# Altium PCB PCB1.PcbDoc
Units mil, origin at the board's own origin, x right, y up, seen from the top; angles counter-clockwise.
Board outline 3740 x 3020 mil, 4 copper layers (Top Layer, Layer 1 (GND), Layer 2 (PWR), Bottom Layer), stack 23.756 mil thick; 54 components, 42 nets, 323 pads, 4 vias.
Unrouted connection lines stored in the file: 144.
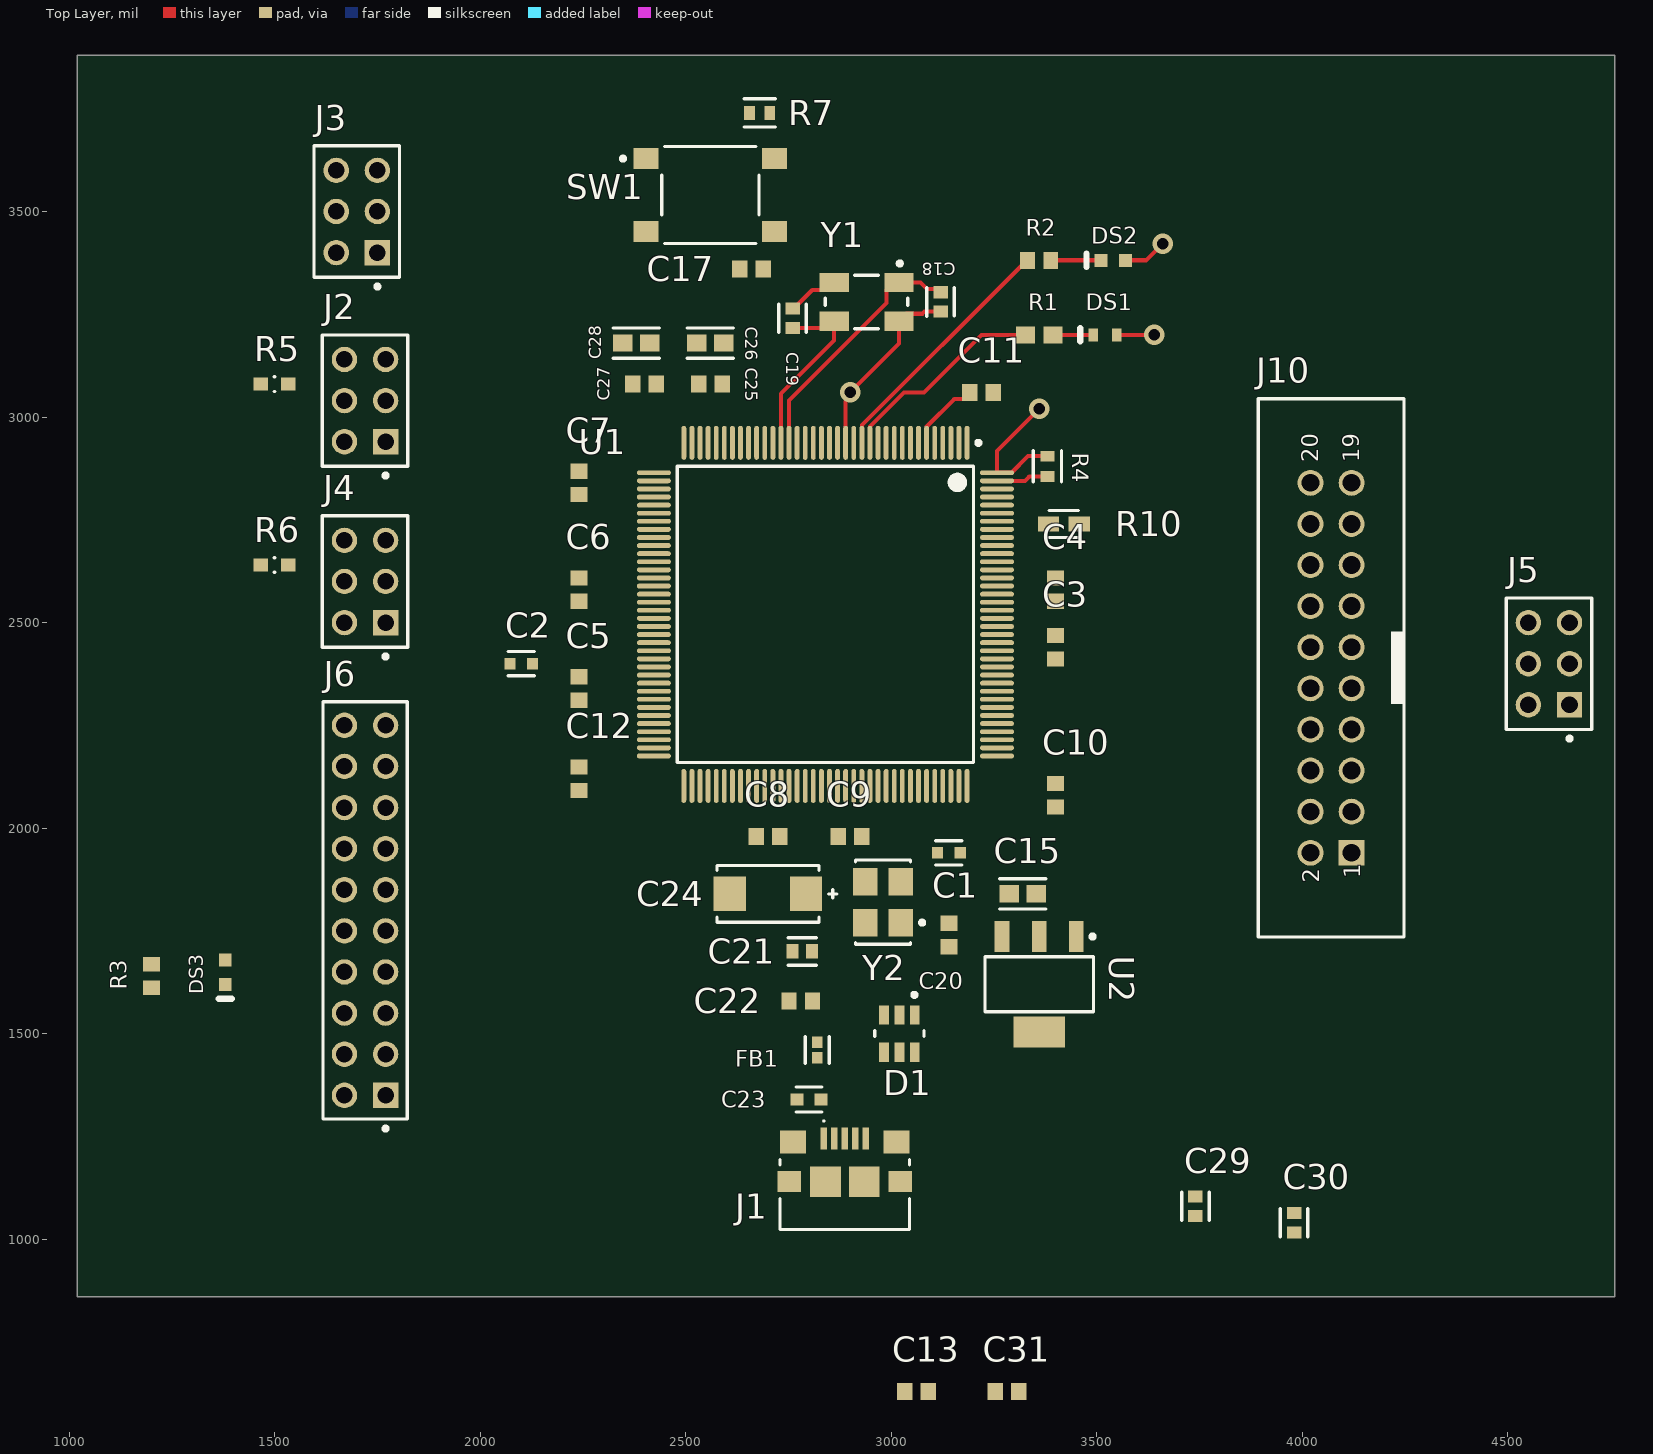
[diagram p0: Top Layer view]
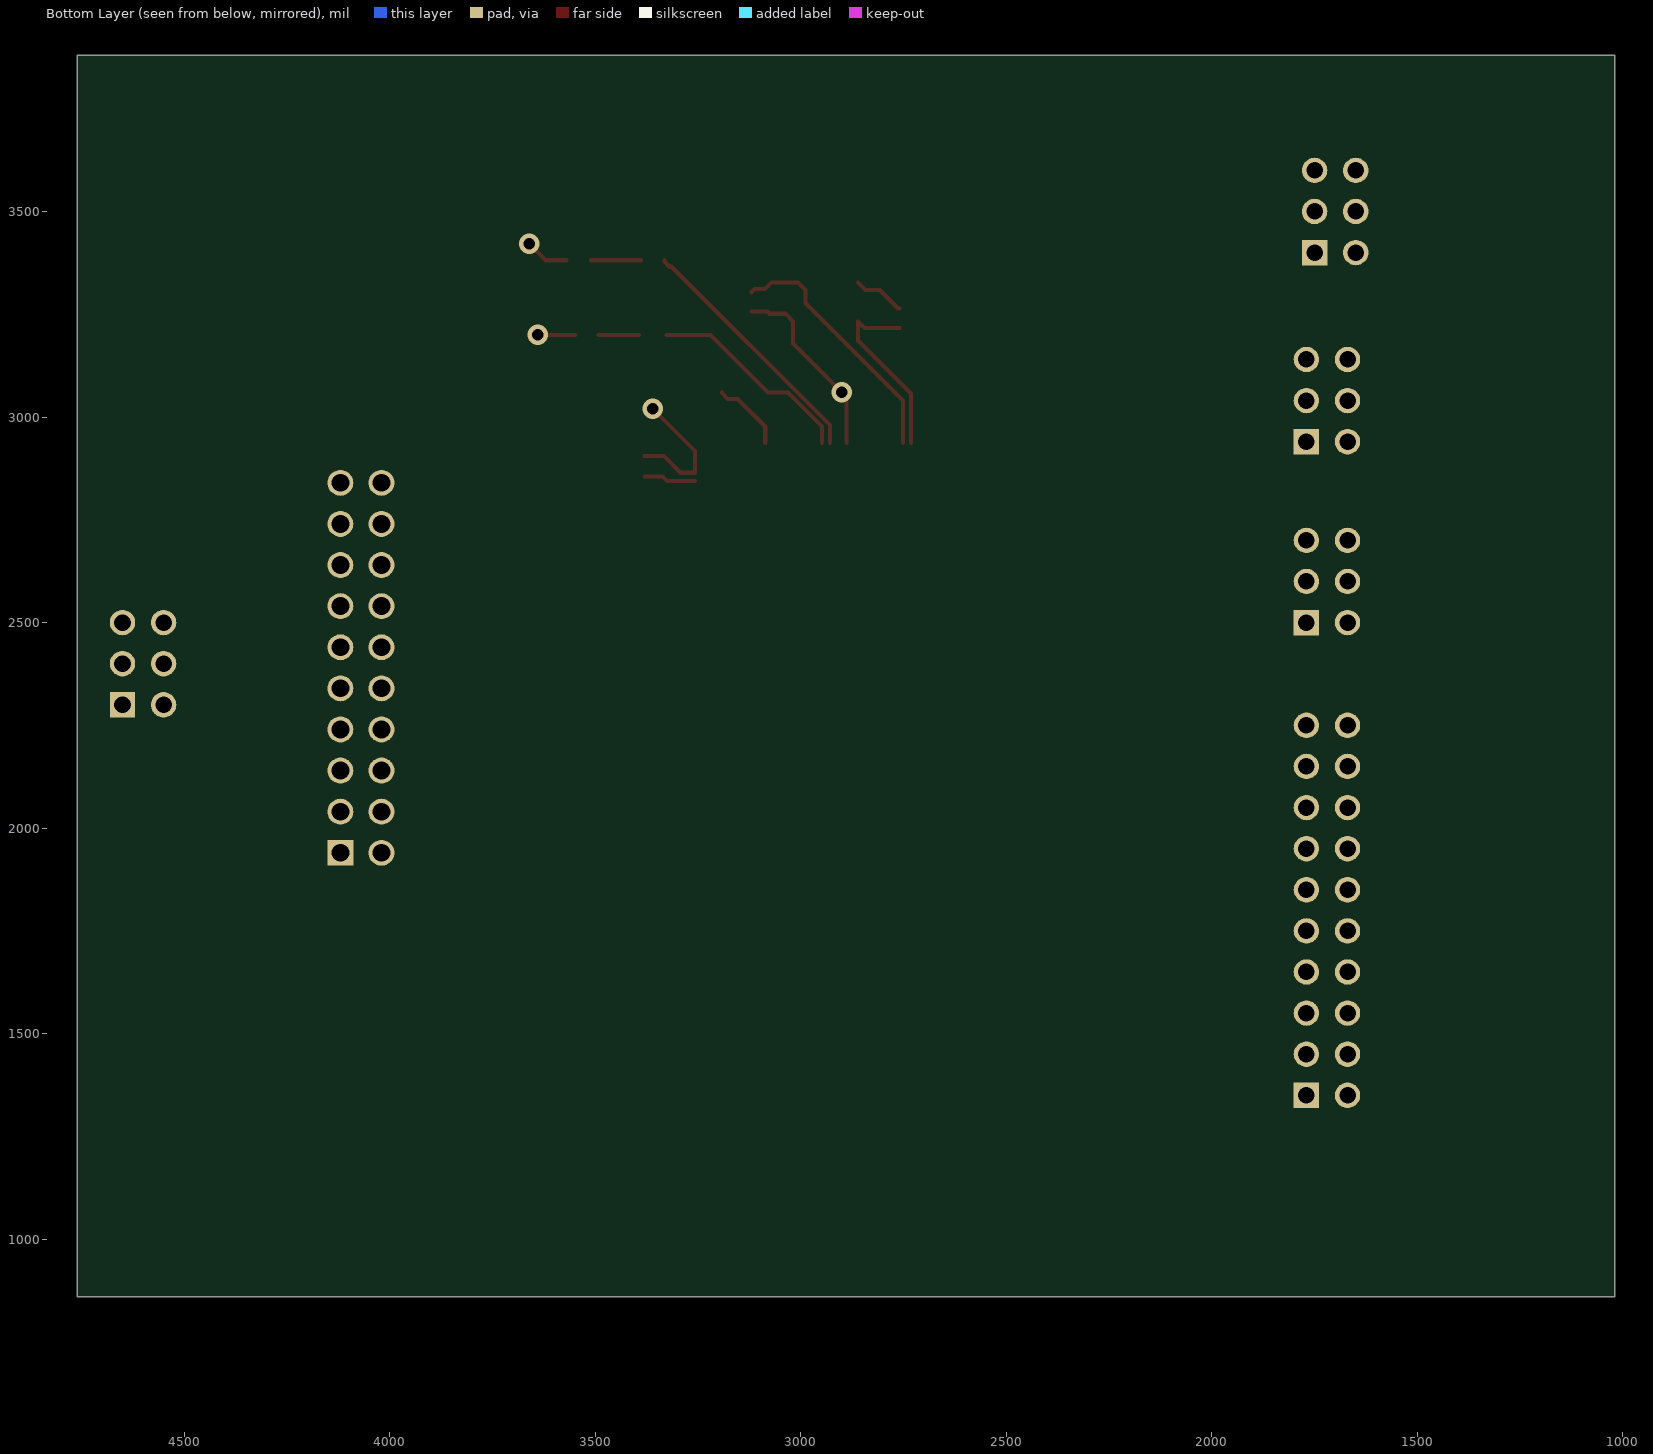
[diagram p1: Bottom Layer view, seen from below]
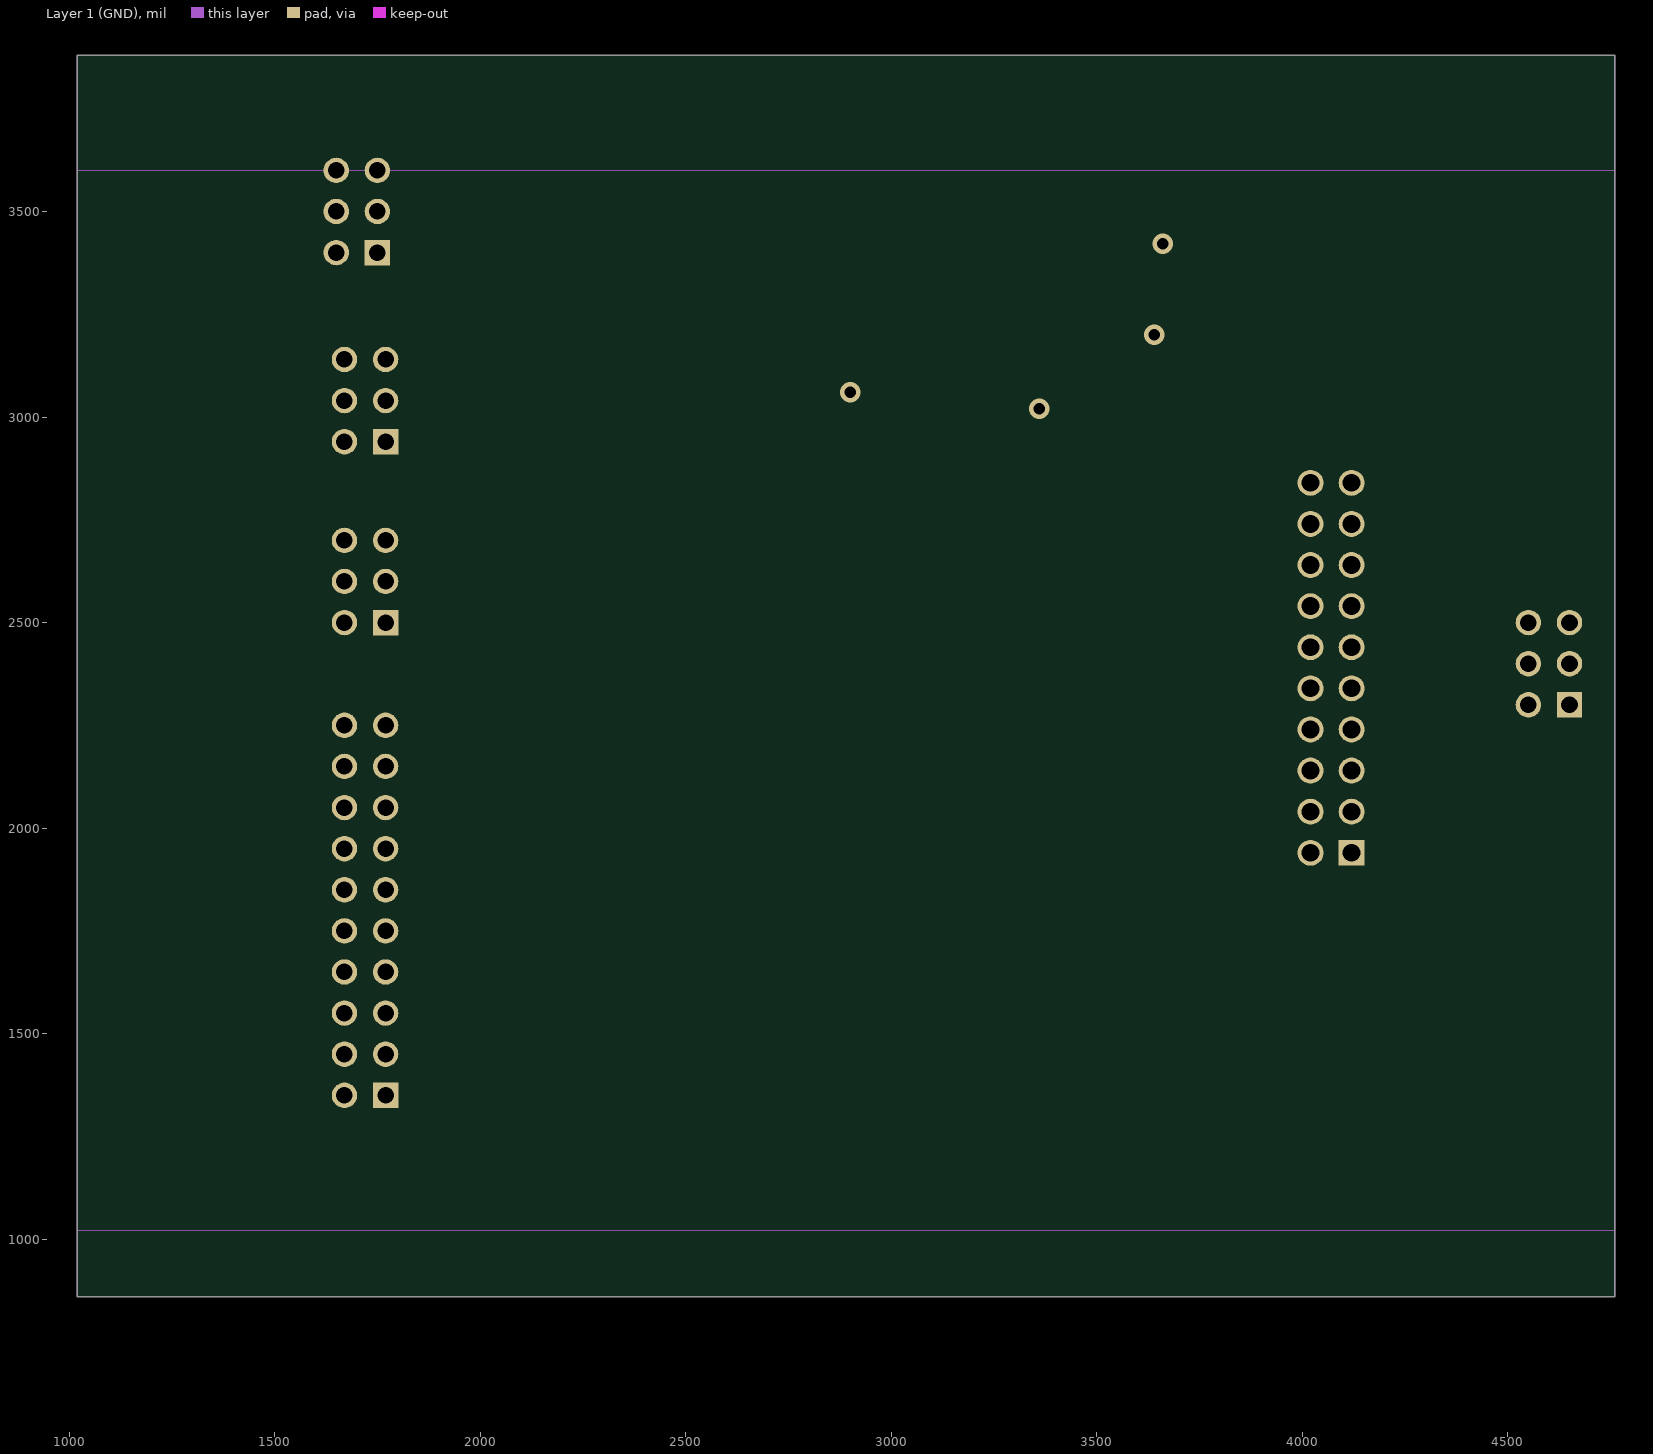
[diagram p2: Layer 1 (GND)]
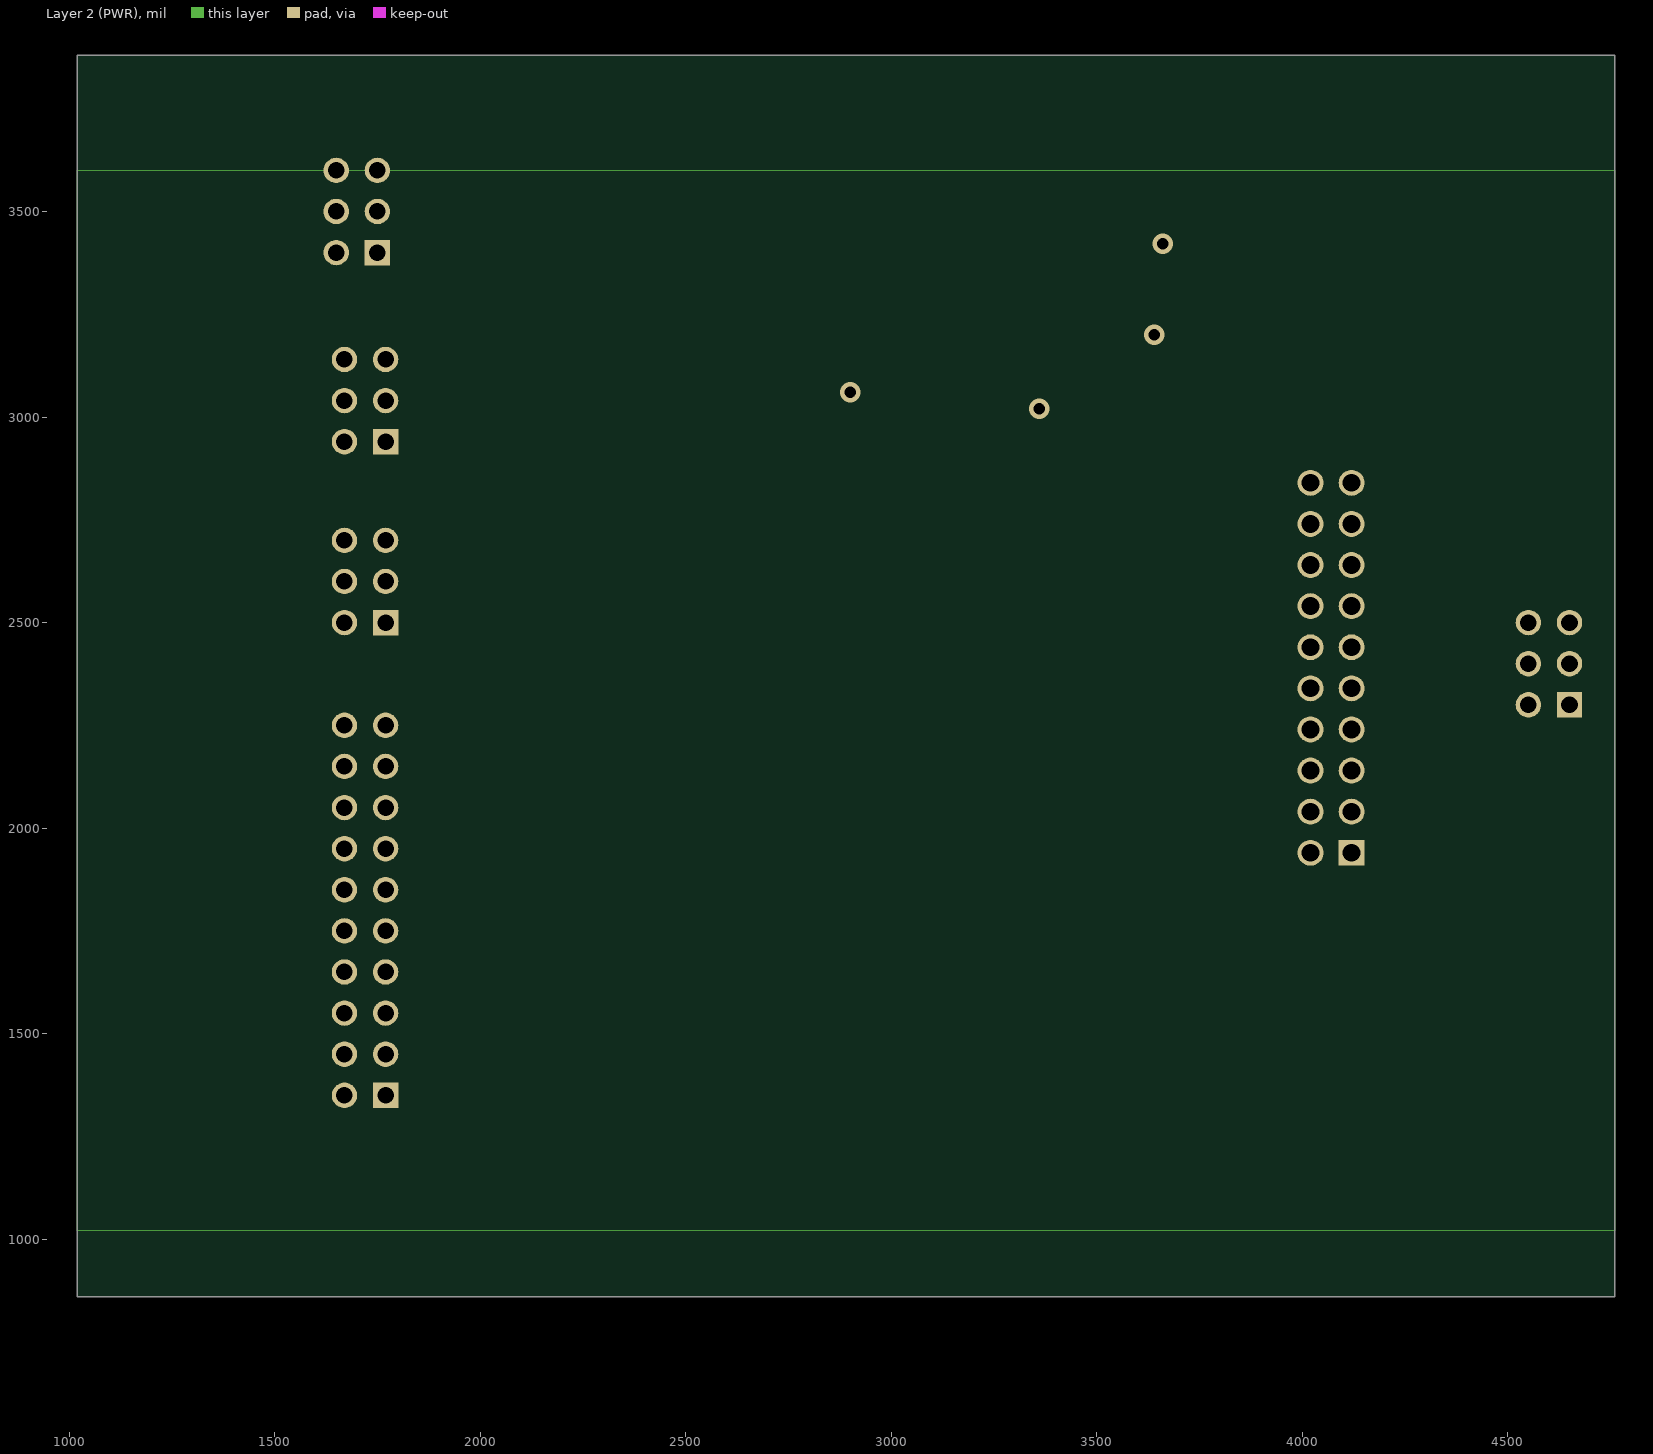
[diagram p3: Layer 2 (PWR)]

## Layer stack, top to bottom
Top Solder: solder mask 0.4, Solder Resist, Dk 3.5
Top Layer: signal copper 1.4
Dielectric 2: prepreg 2.8, PP-006, Dk 4.1
Layer 1 (GND): signal copper 1.378
Dielectric 1: dielectric 12.6, FR-4, Dk 4.8
Layer 2 (PWR): signal copper 1.378
Dielectric 3: prepreg 2.8, PP-006, Dk 4.1
Bottom Layer: signal copper 1.4
Bottom Solder: solder mask 0.4, Solder Resist, Dk 3.5

## Board outline
1020,860 4760,860 4760,3880 1020,3880

## Design rules (kind name [scope] priority, off if disabled: settings)
BoardOutlineClearance [All] p1: gap=10 ignorepadtopadclearanceinfootprint=FALSE except(0: Arc-SplitContinuation Track-SplitContinuation SMDPad-SplitContinuation THPad-SplitContinuation Via-SplitContinuation Fill-SplitContinuation Poly-SplitContinuation Region-SplitContinuation Text-SplitContinuation)
Clearance [All] p1: gap=10 ignorepadtopadclearanceinfootprint=FALSE except(0: Arc-Hole Track-Hole SMDPad-Hole THPad-Hole Via-Hole Fill-Hole Poly-Hole Region-Hole Text-Hole; 6: Arc-Arc Arc-Track Arc-SMDPad Arc-THPad Track-Track Track-SMDPad Track-THPad SMDPad-SMDPad SMDPad-THPad THPad-THPad)
DiffPairsRouting [All] p1: maxlimit=10 minlimit=6 mostfreqgap=6 toplayer_minwidth=6 toplayer_maxwidth=15 toplayer_prefwidth=6 midlayer1_minwidth=6 midlayer1_maxwidth=15 midlayer1_prefwidth=6 midlayer2_minwidth=6 midlayer2_maxwidth=15 midlayer2_prefwidth=6 bottomlayer_minwidth=6 bottomlayer_maxwidth=15 bottomlayer_prefwidth=6 maxuncoupledlength=500
PolygonConnect [All] p1: connectstyle=Relief reliefconductorwidth=10 reliefentries=4 polygonreliefangle="90 Angle" airgapwidth=10
RoutingVias [All] p1: holewidth=28 width=50 viastyle="Through Hole" minholewidth=28 minwidth=50 maxholewidth=28 maxwidth=50
SolderMaskExpansion [All] p1: expansion=4 istentingtop=FALSE
Width [All] p1: maxlimit=10 minlimit=6 preferedwidth=6 minimp=50.000000 maximp=50.000000 favimp=50.000000
29 further rules are at their usual default settings.

## Classes and differential pairs
differential pair D: +D_P -D_N

## Components (designator, comment, footprint, x,y, rotation, side; value= is the part's Value field where it differs from the comment)
C1 "2.2μF" FP-C1608-080-0_1-MFG 3140,1940 r180 top
C2 "2.2μF" FP-C1608-080-0_1-MFG 2100,2400 r0 top
C3 "100nF" SAMS-C0603-2_M 3400,2440 r90 top
C4 "100nF" SAMS-C0603-2_M 3400,2580 r90 top
C5 "100nF" SAMS-C0603-2_M 2240,2340 r270 top
C6 "100nF" SAMS-C0603-2_M 2240,2580 r270 top
C7 "100nF" SAMS-C0603-2_M 2240,2840 r270 top
C8 "100nF" SAMS-C0603-2_M 2700,1980 r0 top
C9 "100nF" SAMS-C0603-2_M 2900,1980 r0 top
C10 "100nF" SAMS-C0603-2_M 3400,2080 r90 top
C11 "100nF" SAMS-C0603-2_M 3220,3060 r180 top
C12 "100nF" SAMS-C0603-2_M 2240,2120 r90 top
C13 "100nF" SAMS-C0603-2_M 3061.38,630 r0 top
C15 "1uF" FP-0603-L_1_6_0_15-W_0_81-IPC_A 3320,1840 r0 top
C17 "100nF" SAMS-C0603-2_M 2660,3360 r0 top
C18 "20pF" FP-C0603C-CF-MFG 3120,3280 r270 top value="20 pF"
C19 "20pF" FP-C0603C-CF-MFG 2760,3240 r90 top value="20 pF"
C20 "100nF" SAMS-C0603-2_M 3140,1740 r270 top
C21 "4.7uF" FP-C0603-CG-MFG 2783.62,1700 r180 top
C22 "100nF" SAMS-C0603-2_M 2780,1580 r0 top
C23 "10nF" FP-0603-L_1_6_0_15-W_0_81-MFG 2800,1340 r180 top
C24 "22uF" FP-T491C226K010AT-MFG 2700,1840 r0 top
C25 "100nF" SAMS-C0603-2_M 2560,3080 r180 top
C26 "1uF" FP-0603-L_1_6_0_15-W_0_81-IPC_A 2560,3180 r0 top
C27 "100nF" SAMS-C0603-2_M 2400,3080 r0 top
C28 "1uF" FP-0603-L_1_6_0_15-W_0_81-IPC_A 2380,3180 r180 top
C29 "4.7uF" FP-C0603-CG-MFG 3740,1080 r90 top
C30 "4.7uF" FP-C0603-CG-MFG 3980,1040 r90 top
C31 "100nF" SAMS-C0603-2_M 3281.38,630 r0 top
D1 "ESD Protector" FP-SOT23-6L-MFG 3020,1500 r270 top value=3pF
DS1 "Yellow" VISH-TLMY1000_V 3520,3200 r180 top
DS2 "Red" AVAG-HSMX-C190_V 3540,3381.3 r180 top
DS3 "Blue" AVAG-HSMX-C190_V 1380,1649.53 r270 top
FB1 "Ferrite Bead" FP-BLM15-0_05-IPC_A 2820,1460 r90 top
J1 "1981568-1" TECO-1981568-5_V 2887.24,1245.32 r0 top
J2 "Microphone 1" FP-M20-9980346-MFG 1720,3040 r90 top
J3 "SPI Connection" FP-M20-9980346-MFG 1700,3500 r90 top
J4 "Microphone 2" FP-M20-9980346-MFG 1720,2600 r90 top
J5 "Serial Debugger" FP-M20-9980346-MFG 4600,2400 r90 top
J6 "20 Pin Header" FP-TSW-110-08-G-D-MFG 1720,1800 r90 top
J10 "61202021621" 61202021621 4070,2390 r90 top
R1 "560Ω" RESC1608X55X30ML15T15#1 3360,3200 r180 top
R2 "665Ω" RESC1608X55X30ML15T15#2 3360,3381.3 r180 top
R3 "665Ω" RESC1608X55X30ML15T15#2 1200,1640 r270 top
R4 "10K" FP-MCT0603-IPC_C 3380,2880 r90 top
R5 "100K" FP-RC0603-0_55-MFG 1500,3080 r0 top
R6 "100K" FP-RC0603-0_55-MFG 1500,2640 r0 top
R7 "10K" FP-MCT0603-IPC_C 2680,3740 r180 top
R10 "HCJ0603ZT0R00" FP-HCJ0603-MFG 3420,2740 r0 top
SW1 "PTS645SM43SMTR92LFS" FP-PTS645SM43SMTR92LFS-MFG 2560,3540 r0 top
U1 "STM32F446ZET7" STM-LQFP144_M 2840,2520 r270 top
U2 "TC1108-3.3VDBTR" SOT-223-DB3_L 3360,1620 r270 top
Y1 "OSC-8MHz" FP-ABM3B-MFG 2940,3280 r180 top
Y2 "12.288MHz Oscillator" FP-ASFL1-MFG 2980,1820 r90 top

## Footprints (in the part's own frame and the unit in brackets; to place one, negate y for a bottom-side part, rotate by r counter-clockwise, add the part's x,y. Pads: shape width x height; smd on the part's side, far side on the other; paste and mask are expansions set on the pad)
61202021621 [mm] "20 pins, straight, gold plating"
  rect 1.6x1.6 hole 1.1: 1(-11.43,-1.27)
  round 1.6 hole 1.1: 2(-11.43,1.27) 3(-8.89,-1.27) 4(-8.89,1.27) 5(-6.35,-1.27) 6(-6.35,1.27) 7(-3.81,-1.27) 8(-3.81,1.27) 9(-1.27,-1.27) 10(-1.27,1.27) 11(1.27,-1.27) 12(1.27,1.27) 13(3.81,-1.27) 14(3.81,1.27) 15(6.35,-1.27) 16(6.35,1.27) 17(8.89,-1.27) 18(8.89,1.27) 19(11.43,-1.27) 20(11.43,1.27)
  silkscreen extent -16.63,-4.5 16.63,4.5, body extent -16.53,-4.42 16.53,4.75, height 9.13
AVAG-HSMX-C190_V [mm] "SMD, 2-Leads, Body 1.6x0.8mm, Height 0.9mm"
  rect 0.8x0.8 smd: 1(-0.75,0) 2(0.75,0)
  silkscreen extent 1.65,-0.4 1.65,0.4, body extent -0.8,-0.4 0.8,0.4, height 0.9
FP-0603-L_1_6_0_15-W_0_81-IPC_A [mil]
  rect 47.5x42.06 smd paste+0 mask+0: 1(-32.51,0) 2(32.51,0)
  silkscreen extent -56,-37 56,37, body extent -76,-41 76,41, height 10
FP-0603-L_1_6_0_15-W_0_81-MFG [mm]
  rect 0.8x0.75 smd paste+0 mask+0: 1(-0.75,0) 2(0.75,0)
  silkscreen extent -0.8,-0.77 0.8,0.77, body extent -1.25,-0.58 1.25,0.58, height 0.25
FP-ABM3B-MFG [mm]
  rect 1.8x1.2 smd paste+0 mask+0: 1(-2,-1.2) 2(2,-1.2) 3(2,1.2) 4(-2,1.2)
  silkscreen extent -2.55,-2.5 2.55,1.65, body extent -3,-1.9 3,1.9, height 0.25
FP-ASFL1-MFG [mm]
  rect 1.7x1.5 smd paste+0 mask+0: 1(-1.27,-1.1) 2(1.27,-1.1) 3(1.27,1.1) 4(-1.27,1.1)
  silkscreen extent -2.6,-2.55 2.6,1.7, body extent -2.7,-1.95 2.7,1.95, height 0.25
FP-BLM15-0_05-IPC_A [mil]
  rect 28.16x26.48 smd paste+0 mask+0: 1(-18.84,0) 2(18.84,0)
  silkscreen extent -33,-29 33,29, body extent -41,-21 41,21, height 10
FP-C0603-CG-MFG [mm]
  rect 0.75x0.9 smd paste+0 mask+0: 1(-0.6,0) 2(0.6,0)
  silkscreen extent -0.87,-0.85 0.87,0.85, body extent -1.2,-0.6 1.2,0.6, height 0.25
FP-C0603C-CF-MFG [mm]
  rect 0.75x0.9 smd paste+0 mask+0: 1(-0.6,0) 2(0.6,0)
  silkscreen extent -0.87,-0.85 0.88,0.85, body extent -1.2,-0.6 1.2,0.6, height 0.25
FP-C1608-080-0_1-MFG [mm]
  rect 0.7x0.7 smd paste+0 mask+0: 1(-0.7,0) 2(0.7,0)
  silkscreen extent -0.8,-0.75 0.8,0.75, body extent -1.15,-0.55 1.15,0.55, height 0.25
FP-HCJ0603-MFG [mm]
  rect 1.3x0.92 smd paste+0 mask+0: 1(-0.95,0) 2(0.95,0)
  silkscreen extent -0.9,-0.83 0.9,0.83, body extent -1.7,-0.63 1.7,0.63, height 0.25
FP-M20-9980346-MFG [mm]
  rect 1.57x1.57 hole 1.02 paste-1000 mask+0: 1(-2.54,-1.27)
  round 1.57 hole 1.02 paste-1000 mask+0: 2(-2.54,1.27) 3(0,-1.27) 4(0,1.27) 5(2.54,-1.27) 6(2.54,1.27)
  silkscreen extent -4.76,-2.64 4.06,2.64, body extent -4.16,-2.74 4.16,2.74, height 0.25
FP-MCT0603-IPC_C [mil]
  rect 26.13x33.94 smd paste+0 mask+0: 1(-24.78,0) 2(24.78,0)
  silkscreen extent -38,-34 38,34, body extent -42,-23 42,23, height 10
FP-PTS645SM43SMTR92LFS-MFG [mm]
  rect 1.55x1.3 smd paste+0 mask+0: 1(-3.975,2.25) 2(3.975,2.25) 3(-3.975,-2.25) 4(3.975,-2.25)
  silkscreen extent -5.52,-3 3,3, body extent -4.85,-3.1 4.85,3.1, height 0.25
FP-RC0603-0_55-MFG [mm]
  rect 0.9x0.8 smd paste+0 mask+0: 1(-0.85,0) 2(0.85,0)
  silkscreen extent -0.03,-0.45 0.03,0.45, body extent -1.4,-0.55 1.4,0.55, height 0.25
FP-SOT23-6L-MFG [mm]
  rect 1.2x0.6 smd paste+0 mask+0: 1(-1.15,0.95) 2(-1.15,0) 3(-1.15,-0.95) 4(1.15,-0.95) 5(1.15,0) 6(1.15,0.95)
  silkscreen extent -2.52,-1.53 0.18,1.53, body extent -1.85,-1.63 1.85,1.63, height 0.25
FP-T491C226K010AT-MFG [mm]
  rect 1.99x2.13 smd paste+0 mask+0: 1(-2.36,0) 2(2.36,0)
  silkscreen extent -3.15,-1.75 4.25,1.75, body extent -3.48,-1.87 3.48,1.87, height 0.25
FP-TSW-110-08-G-D-MFG [mm]
  rect 1.57x1.57 hole 1.02 paste-1000 mask+0: 1(-11.43,-1.27)
  round 1.57 hole 1.02 paste-1000 mask+0: 2(-11.43,1.27) 3(-8.89,-1.27) 4(-8.89,1.27) 5(-6.35,-1.27) 6(-6.35,1.27) 7(-3.81,-1.27) 8(-3.81,1.27) 9(-1.27,-1.27) 10(-1.27,1.27) 11(1.27,-1.27) 12(1.27,1.27) 13(3.81,-1.27) 14(3.81,1.27) 15(6.35,-1.27) 16(6.35,1.27) 17(8.89,-1.27) 18(8.89,1.27) 19(11.43,-1.27) 20(11.43,1.27)
  silkscreen extent -13.61,-2.61 12.89,2.61, body extent -12.99,-2.71 12.99,2.71, height 0.25
RESC1608X55X30ML15T15#1 [mm] "Chip Resistor, 2-Leads, Body 1.75x0.95mm, IPC Low Density"
  rect 1.15x1.05 smd: 1(-0.85,0) 2(0.85,0)
  body extent -0.87,-0.48 0.87,0.48, height 0.55
RESC1608X55X30ML15T15#2 [mm] "Chip Resistor, 2-Leads, Body 1.60x0.80mm, IPC Low Density"
  rect 0.9x1.05 smd: 1(-0.725,0) 2(0.725,0)
  body extent -0.87,-0.48 0.87,0.48, height 0.55
SAMS-C0603-2_M [mm] "Chip Capacitor, 2-Leads, Body 1.70x0.90mm, IPC Low Density"
  rect 0.95x1.05 smd: 1(-0.725,0) 2(0.725,0)
  body extent -0.85,-0.45 0.85,0.45, height 0.9
SOT-223-DB3_L [mm] "SOT223, 4-Leads, Body 6.5x3.5mm, Pitch 2.3mm, Lead Span 7mm, IPC High Density"
  rect 1.9x0.9 smd: 1(-2.95,2.3) 2(-2.95,0) 3(-2.95,-2.3)
  rect 1.9x3.2 smd: 4(2.95,0)
  silkscreen extent -3.07,-3.35 1.7,3.43, body extent -1.85,-3.35 1.85,3.35, height 1.8
STM-LQFP144_M [mm] "Thin QFP, 144-Leads, Body 20x20mm, Pitch 0.5mm, IPC Low Density"
  oval 2.1x0.3 smd: 1(-10.6,8.75) 2(-10.6,8.25) 3(-10.6,7.75) 4(-10.6,7.25) 5(-10.6,6.75) 6(-10.6,6.25) 7(-10.6,5.75) 8(-10.6,5.25) 9(-10.6,4.75) 10(-10.6,4.25) 11(-10.6,3.75) 12(-10.6,3.25) 13(-10.6,2.75) 14(-10.6,2.25) 15(-10.6,1.75) 16(-10.6,1.25) 17(-10.6,0.75) 18(-10.6,0.25) 19(-10.6,-0.25) 20(-10.6,-0.75) 21(-10.6,-1.25) 22(-10.6,-1.75) 23(-10.6,-2.25) 24(-10.6,-2.75) 25(-10.6,-3.25) 26(-10.6,-3.75) 27(-10.6,-4.25) 28(-10.6,-4.75) 29(-10.6,-5.25) 30(-10.6,-5.75) 31(-10.6,-6.25) 32(-10.6,-6.75) 33(-10.6,-7.25) 34(-10.6,-7.75) 35(-10.6,-8.25) 36(-10.6,-8.75) 73(10.6,-8.75) 74(10.6,-8.25) 75(10.6,-7.75) 76(10.6,-7.25) 77(10.6,-6.75) 78(10.6,-6.25) 79(10.6,-5.75) 80(10.6,-5.25) 81(10.6,-4.75) 82(10.6,-4.25) 83(10.6,-3.75) 84(10.6,-3.25) 85(10.6,-2.75) 86(10.6,-2.25) 87(10.6,-1.75) 88(10.6,-1.25) 89(10.6,-0.75) 90(10.6,-0.25) 91(10.6,0.25) 92(10.6,0.75) 93(10.6,1.25) 94(10.6,1.75) 95(10.6,2.25) 96(10.6,2.75) 97(10.6,3.25) 98(10.6,3.75) 99(10.6,4.25) 100(10.6,4.75) 101(10.6,5.25) 102(10.6,5.75) 103(10.6,6.25) 104(10.6,6.75) 105(10.6,7.25) 106(10.6,7.75) 107(10.6,8.25) 108(10.6,8.75)
  oval 0.3x2.1 smd: 37(-8.75,-10.6) 38(-8.25,-10.6) 39(-7.75,-10.6) 40(-7.25,-10.6) 41(-6.75,-10.6) 42(-6.25,-10.6) 43(-5.75,-10.6) 44(-5.25,-10.6) 45(-4.75,-10.6) 46(-4.25,-10.6) 47(-3.75,-10.6) 48(-3.25,-10.6) 49(-2.75,-10.6) 50(-2.25,-10.6) 51(-1.75,-10.6) 52(-1.25,-10.6) 53(-0.75,-10.6) 54(-0.25,-10.6) 55(0.25,-10.6) 56(0.75,-10.6) 57(1.25,-10.6) 58(1.75,-10.6) 59(2.25,-10.6) 60(2.75,-10.6) 61(3.25,-10.6) 62(3.75,-10.6) 63(4.25,-10.6) 64(4.75,-10.6) 65(5.25,-10.6) 66(5.75,-10.6) 67(6.25,-10.6) 68(6.75,-10.6) 69(7.25,-10.6) 70(7.75,-10.6) 71(8.25,-10.6) 72(8.75,-10.6) 109(8.75,10.6) 110(8.25,10.6) 111(7.75,10.6) 112(7.25,10.6) 113(6.75,10.6) 114(6.25,10.6) 115(5.75,10.6) 116(5.25,10.6) 117(4.75,10.6) 118(4.25,10.6) 119(3.75,10.6) 120(3.25,10.6) 121(2.75,10.6) 122(2.25,10.6) 123(1.75,10.6) 124(1.25,10.6) 125(0.75,10.6) 126(0.25,10.6) 127(-0.25,10.6) 128(-0.75,10.6) 129(-1.25,10.6) 130(-1.75,10.6) 131(-2.25,10.6) 132(-2.75,10.6) 133(-3.25,10.6) 134(-3.75,10.6) 135(-4.25,10.6) 136(-4.75,10.6) 137(-5.25,10.6) 138(-5.75,10.6) 139(-6.25,10.6) 140(-6.75,10.6) 141(-7.25,10.6) 142(-7.75,10.6) 143(-8.25,10.6) 144(-8.75,10.6)
  silkscreen extent -10.72,-9.15 9.15,9.58, body extent -10,-10 10,10, height 1.6
TECO-1981568-5_V [mm] "SMD, 5-Leads, Body 8x5.9mm, Pitch 0.65mm"
  rect 0.4x1.35 smd: 1(-1.3,0) 2(-0.65,0) 3(0,0) 4(0.65,0) 5(1.3,0)
  rect 1.6x1.4 smd: 6(-3.2,-0.225) 7(3.2,-0.225)
  rect 1.45x1.3 smd: 8(-3.425,-2.675) 9(3.425,-2.675)
  rect 1.9x1.9 smd: 10(-1.2,-2.675) 11(1.2,-2.675)
  silkscreen extent -4,-5.63 4,1.12, body extent -4,-5.63 4,0.28, height 3
VISH-TLMY1000_V [mm] "SMD, 2-Leads, Body 1.6x0.8mm"
  rect 0.6x0.8 smd: 1(-0.725,0) 2(0.725,0)
  silkscreen extent 1.53,-0.4 1.53,0.4, body extent -0.8,-0.4 0.8,0.4, height 0.65

## Part data
C1 C2: library part CMP-08246-004960-1, "Multilayer Ceramic Capacitors 2.2μF ±10% 35V X5R SMD 0603 / C1608X5R1V225K080AC", Capacitance=2.2uF, Case Code (Imperial)=0603, Case Code (Metric)=1608, Dielectric=X5R, Dielectric Material=Ceramic, Max Operating Temperature=85°C, Min Operating Temperature=-55°C, Package Quantity=1, Tolerance=10%, Voltage=35V, Case/Package=0603, Construction=Flat, Depth=0.8mm, Height=0.8mm, Lead Free="Lead Free", Length=1.6mm, Mount="Surface Mount", Packaging="Tape and Reel", Radiation Hardening=No, REACH SVHC="No SVHC", Resistor Type=Ceramic, RoHS Compliant=Yes, Series=C, Termination=SMD/SMT, Thickness=800um, Voltage Rating=35V, Voltage Rating (DC)=35V, Weight=7.1E-05oz, Width=0.031inch
C3 C4 C5 C6 C7 C8 C9 C10 C11 C12 C13 C17 C20 C22 C25 C27 C31: library part CMP-2000-05332-1, "Multi-layer Ceramic Capacitor, -55 to 125 degC, 2-Pin SMD (0603), RoHS, Tape and Reel / CL10B104KB8NNNC", Capacitance=0.1µF, Case Size/Dimension=0603, Dielectric=X7R, Manufacturer="Samsung Electro-Mechanics", Rated Voltage=50V, Tolerance (%)=±10%, Datasheet URL=https://datasheet.ciiva.com/29198/456651-da-01-en-vs-kondensator-0605-29198839.pdf, Datasheet Version=Nov-10, Manufacturer URL=http://www.samsungsem.com/global/index.jsp
C15 C26 C28: library part CMP-2006-04559-3, "General Purpose Ceramic Capacitor, 0603, 1uF, 10%, X5R, 15%, 10V / 0603ZD105KAT2A", Case Code (Imperial)=0603, Case Code (Metric)=1608, Dielectric=X5R, Insulation Resistance=100GR, Max Operating Temperature=85°C, Min Operating Temperature=-55°C, Package Quantity=4000, Tolerance=10%, Voltage=10V, Capacitance=1uF, Case/Package=0603, Construction=Flat, Contact Plating=Tin, Depth=0.81mm, Dissipation Factor=5%, Height=0.9mm, Lead Free="Lead Free", Length=1.6mm, Mount="Surface Mount", Number of Pins=2, Packaging="Tape and Reel", Radiation Hardening=No, REACH SVHC="No SVHC", RoHS Compliant=Yes, Series=-, Termination=SMD/SMT, Thickness=0.035inch, Voltage Rating=10V, Voltage Rating (DC)=10V, Width=0.81mm
C18 C19: library part CMP-1035-00783-3, "CAP CER 20PF 50V 5% NP0 0603 / C0603C200J5GACTU", Capacitance="20 pF", Manufacturer=KEMET, Manufacturer Part Number=C0603C200J5GACTU, Package=C0603C-CF, Temperature="-55°C to +125°C", Temperature Characteristic=C0G, Temperature Coefficient=30ppm/°C, Temperature Range High=+125°C, Temperature Range Low=-55°C, Tolerance=0.05, Voltage Rating="50 V", Automotive=Yes, Automotive Grade="Grade 1", Category=Cap, ComponentLink2Description=Datasheet, ComponentLink2URL=https://api.kemet.com/component-edge/download/datasheet/C0603C100J5GACAUTO.pdf, Device Class L1="Passive Components", Device Class L2=Capacitors, Device Class L3="Ceramic Capacitors", Digikey Description="CAP CER 20PF 50V 5% NP0 0603", Height=0.87mm, Lead Free=Yes, Material=Ceramic, Mouser Description="Multilayer Ceramic Capacitors MLCC - SMD/SMT 50volts 20pF C0G 5%", Octopart=https://octopart.com/c0603c200j5gactu-kemet-9138585, RoHS=TRUE
C21 C29 C30: library part CMP-2006-02256-2, "CAP CER 4.7UF 6.3V X5R 0603 / C0603C475K9PACTU", Manufacturer=Kemet, Manufacturer Part Number=C0603C475K9PACTU, Package=C0603-CG, Temperature="-55°C to +85°C", Temperature Characteristic=X5R, Temperature Coefficient=15%, Temperature Range High=+85°C, Temperature Range Low=-55°C, Tolerance=10%, Voltage Rating=6.3V, Automotive=No, Capacitance=4.7uF, Category=Cap, ComponentLink2Description=Datasheet, ComponentLink2URL=https://content.kemet.com/datasheets/KEM_C1006_X5R_SMD.pdf, Device Class L1="Passive Components", Device Class L2=Capacitors, Device Class L3="Ceramic Capacitors", Digikey Description="CAP CER 4.7UF 6.3V X5R 0603", Height=0.9mm, Ipc Land Pattern Name=CAPC16080X80, Lead Free=Yes, Material=Ceramic, Mouser Description="Multilayer Ceramic Capacitors MLCC - SMD/SMT 6.3volts 4.7uF X5R 10%", Octopart=https://octopart.com/c0603c475k9pactu-kemet-104242, RoHS=TRUE
C23: library part CMP-2006-04374-2, "General Purpose Ceramic Capacitor, 0603, 10nF, 10%, X7R, 15%, 50V", Case Code (Imperial)=0603, Case Code (Metric)=1608, Dielectric=X7R, Dielectric Material=Ceramic, Insulation Resistance=100GR, Max Operating Temperature=125°C, Min Operating Temperature=-55°C, Package Quantity=1, Tolerance=10%, Voltage=50V, Capacitance=10nF, Case/Package=0603, Contact Plating=Tin, Depth=0.81mm, Dissipation Factor=2.5%, Height=0.9mm, Lead Free="Lead Free", Length=1.6mm, Mount="Surface Mount", Number of Pins=2, Packaging="Tape and Reel", Radiation Hardening=No, REACH SVHC="No SVHC", Termination=SMD/SMT, Thickness=0.035inch, Voltage Rating=50V, Voltage Rating (DC)=50V, Width=0.032inch
C24: library part CMP-03017-000041-1, "CAP TANT 22UF 10% 10V 2312 / T491C226K010AT", Case Code (Imperial)=2312, Case Code (Metric)=6032, Case/Package=Molded, Dielectric Material=Tantalum, ESR (Equivalent Series Resistance)=1.8R, Leakage Current=2.2uA, Max Operating Temperature=125°C, Min Operating Temperature=-55°C, Package Quantity=1, Tolerance=20%, Voltage=10V, Capacitance=22uF, Construction=Flat, Depth=3.2mm, Dissipation Factor=6%, Features="General Purpose", Height=2.5mm, Height - Seated (Max)=0.11inch, Lead Free="Lead Free", Length=6mm, Life (Hours)=2000Hour, Mount="Surface Mount", Number of Pins=2, Packaging="Tape and Reel", Polarity=Polar, Radiation Hardening=No, REACH SVHC="No SVHC", RoHS Compliant=Yes, Series=T491, Size=2.5mm, Termination=SMD/SMT, Voltage Rating=10V, Voltage Rating (DC)=10V, Width=3.2mm
D1: library part CMP-2000-07370-2, "TVS DIODE 5.25V 17V SOT23-6 / USBLC6-4SC6", Breakdown Voltage=6V, Capacitance=3pF, Clamping Voltage=17V, Manufacturer=STMicroelectronics, Manufacturer Part Number=USBLC6-4SC6, Max Junction Temp=+125°C, Package=SOT23-6L, Peak Pulse Power=130W, Temperature="-40°C to +125°C", Temperature Range Low=-40°C, Automotive=No, Category=Diode, ComponentLink2Description=Datasheet, ComponentLink2URL=https://upverter.com/datasheet/23dc4ffb028d868909e80577610284b194f13213.pdf, Device Class L1="Circuit Protection", Device Class L2="ESD and Circuit Protection ICs", Device Class L3=unset, Digikey Description="TVS DIODE 5.25V 17V SOT23-6", Direction=Unidirectional, Height=1.45mm, Interface=USB,Ethernet,Other, Lead Free=Yes, Mouser Description="USBLC6 Series 4 Line 6 V Uni / Bi-Directional ESD Protection - SOT-23-6", Number Of Channels=4, Octopart=https://octopart.com/usblc6-4sc6-stmicroelectronics-347147, RoHS=TRUE, Standoff Height=0mm, Temperature Range High=+125°C
DS1: library part CMP-2000-07255-1, "Low Current LED, 40 mW, -40 to 100 degC, 2-Pin SMD, RoHS, Tape and Reel / TLMY1000-GS08", Forward Current If=2mA, Forward Voltage=1.8V, Manufacturer=Vishay, Package Description="2-Pin Surface Mount Device, Body 1.6 x 0.8 mm", Package Reference=TLMY1000, Automotive Qualification Standard=AEC-Q100, Bulb Size=1.6mmx0.8mm, Datasheet URL=http://www.vishay.com/docs/83172/tlmo1000.pdf, Datasheet Version="Rev. 2.0, 09/2013", LED Colour=Yellow, LED Mounting=SMD, Lens Shape=Rectangular, Luminous Intensity=7.5mcd, Manufacturer URL=http://www.vishay.com/, Mounting Technology=SurfaceMount, MSL=MSL2-1year, Packaging=CutTape, Product Range=-, SVHC=ToBeAdvised, Viewing Angle=80°, Wavelength Typ=595nm
DS2: library part CMP-1744-00004-1, "LED Uni-Color Red, 65 mW, 20 mA, -40 to 85 degC, 2-Pin SMD, RoHS, Tape and Reel / HSMH-C190", Current Rating="1 A", Max Operating Temperature="85 degC", Min Operating Temperature="-30 degC", Package Quantity=2000, ComponentLink1Description="Manufacturer URL", ComponentLink1URL=http://www.avagotech.com/, ComponentLink2Description=Datasheet, ComponentLink2URL=http://docs.avagotech.com/docs/AV02-0551EN, ComponentLink3Description="Package Specification", ComponentLink3URL=http://www.fairchildsemi.com/dwg/MA/MA03D.pdf, Connector Type=USB, Contact Material=Copper, Contact Plating=Gold, DatasheetVersion=Mar-12, Gender=Male, Height="2.8 mm", Lead Pitch="0.65 mm", Length="7.5 mm", Mount="Surface Mount", PackageDescription="2-Pin Surface Mount Device, Body 1.6 x 0.8 mm, Height 0.9 mm", PackageReference=HSMX-C190, Packaging="Tape and Reel", Pins=5, REACH SVHC="No SVHC", RoHSCompliant=true, Width="5.6 mm"
DS3: library part CMP-1744-00007-1, "LED Uni-Color Blue, 78 mW, 20 mA, -40 to 85 degC, 2-Pin SMD, RoHS, Tape and Reel / HSMR-C190", Case\Package=TO-236-3, Input Capacitance="73 pF", Max Operating Temperature="150 degC", Max Power Dissipation="360 mW", Min Operating Temperature="-55 degC", Nominal Dual Supply Voltage="-50 V", Package Quantity=3000, ComponentLink1Description="Manufacturer URL", ComponentLink1URL=http://www.avagotech.com/, ComponentLink2Description=Datasheet, ComponentLink2URL=http://docs.avagotech.com/docs/AV02-0977EN, ComponentLink3Description="Package Specification", ComponentLink3URL=http://www.fairchildsemi.com/dwg/MA/MA03D.pdf, DatasheetVersion=Apr-10, Elements=1, Height="0.93 mm", Length="2.92 mm", Mount="Surface Mount", Nominal Vgs="-1.7 V", PackageDescription="2-Pin Surface Mount Device, Body 1.6 x 0.8 mm, Height 0.9 mm", PackageReference=HSMX-C190, Packaging="Tape and Reel", Pins=3, Radiation Hardening=No, Rds On Max="10 Ohm", REACH SVHC="No SVHC", RoHSCompliant=true, Typical Rise Time="6.3 ns", Width="1.3 mm"
FB1: library part CMP-0686-00269-4, "Chip Ferrite Bead, 0402, 220Ω @ 100MHz, 0.1Ω, 25%, 1.4A / BLM15PX221SN1D", Case Code (Imperial)=0402, Case Code (Metric)=1005, Current Rating=1.4A, DC Resistance (DCR)=100mR, Max Operating Temperature=125°C, Min Operating Temperature=-55°C, Package Quantity=1, Test Frequency=100MHz, Tolerance=25%, Case/Package=0402, Height=0.5mm, Impedance=220R, Lead Free="Lead Free", Length=1mm, Material=Steel, Max Current Rating=1.4A, Max DC Current=1.4A, Number of Circuits=1, Number of Lines=1, Number of Pins=2, Packaging="Tape and Reel", RoHS Compliant=Yes, Series=BLM15PX, Termination=SMD/SMT, Width=0.5mm
J1: library part CMP-2000-05408-1, "Micro USB Receptacle Standard Type B Assy, 5-Pin SMD, RoHS, Tape and Reel", Current Rating (Max)=1/ContactA, Manufacturer="TE Connectivity", Operating Temp Range=-55Cto85C, Operating Temperature Max Deg. C=85C, Operating Temperature Min Deg. C=-55C, Voltage Rating Max=30VAC, Body Orientation=RightAngle, Contact Material=CopperAlloy, Contact Plating=GoldOverNickel, Datasheet URL=http://www.mouser.com/ds/2/418/NG_CD_1981568_E2-621296.pdf, Datasheet Version="Rev. E2, 08/2015", Gender=RCP, Housing Material=Thermoplastic, Manufacturer URL=http://www.te.com/, Mounting Style=SurfaceMount, Number of Contacts=5POS, Number of Ports=1Port, Number of Terminals=5, Packaging=TapeandReel, Pitch (mm)=0.65mm, Product Depth (mm)=5.6mm, Product Height (mm)=3mm, Product Length (mm)=8mm, Termination Method=Solder, Type=MicroUSB
J2 J3 J4 J5: library part CMP-2000-06636-2, "CONN HEADER VERT 6POS 2.54MM / M20-9980346", Current Rating=3A, Manufacturer=Harwin, Manufacturer Part Number=M20-9980346, Temperature="-40°C to +105°C", Temperature Range High=+105°C, Temperature Range Low=-40°C, Automotive=No, Category=Conn, ComponentLink2Description=Datasheet, ComponentLink2URL=https://cdn.harwin.com/pdfs/M20-998.pdf, Conn Gender=Male, Conn Orientation=Vertical, Contact Material=Tin,Nickel, Device Class L1=Connectors, Device Class L2="Headers and Wire Housings", Device Class L3=unset, Digikey Description="CONN HEADER VERT 6POS 2.54MM", Height=8.99mm, Lead Free=Yes, Mouser Description="2.54mm (0.1\") Pitch DIL Vertical PC Tail Pin Header, 6.1mm mating pin height, tin, 3+3 contacts", Number of Contacts=6, Number Of Rows=2, Octopart=https://octopart.com/m20-9980346-harwin-5436545, Package=M20-9980346, Pitch=2.54mm, RoHS=TRUE
J6: library part CMP-02766-000083-1, "CONN HEADER VERT 20POS 2.54MM / TSW-110-08-G-D", Manufacturer=Samtec, Manufacturer Part Number=TSW-110-08-G-D, Temperature="-55°C to +125°C", Temperature Range High=+125°C, Temperature Range Low=-55°C, Automotive=No, Category=Conn, ComponentLink2Description=Datasheet, ComponentLink2URL=http://suddendocs.samtec.com/prints/tsw-xxx-xx-xxx-x-xx-xxx-mkt.pdf, Conn Gender=Male, Conn Orientation=Straight, Contact Material=Gold,Nickel, Device Class L1=Connectors, Device Class L2="Headers and Wire Housings", Device Class L3=unset, Digikey Description="CONN HEADER VERT 20POS 2.54MM", Footprint Url=http://suddendocs.samtec.com/prints/tsw-xxx-xx-x-x-xx-xxx-footprint.pdf, Height=8.71mm, Ipc Land Pattern Name=CAPAD1016W80L630D240, Lead Free=Yes, Number of Contacts=20, Number Of Rows=2, Octopart=https://octopart.com/tsw-110-08-g-d-samtec-272555, Package=TSW-110-08-G-D, Pitch=2.54mm, RoHS=TRUE
J10: library part CMP-1502-00010-1, "Male Box Header WR-BHD, THT, Vertical, pitch 2.54 mm, 20 pins", Contact Resistance=20mOhm, Manufacturer="Wurth Elektronik", Operating Temperature=-40to125degC, Withstanding Voltage=500VAC, Working Voltage=250VAC, Datasheet URL=https://katalog.we-online.de/em/datasheet/6120xx21621.pdf, Gender=Male, Manufacturer URL=http://www.we-online.de, Mounting Technology=THT, Orientation=Vertical, Package Reference=61202021621, Packaging=Tray, Part Number=61202021621, Pin Number=20, Pitch=2.54mm, Published Date=August2018, Publisher=WurthElektronik
R1: library part CMP-2000-00564-2, "Chip Resistor, 560 Ohm, +/- 1%, 0.1 W, -55 to 155 degC, 0603 (1608 Metric), RoHS, Tape and Reel / ERJ-3EKF5600V", Case\Package=QFN, Max Operating Temperature="85 degC", Max Supply Voltage="5 V", Min Operating Temperature="-20 degC", Min Supply Voltage="3 V", Output Current="2 A", Output Voltage="35 V", Package Quantity=1500, ComponentLink1Description="Manufacturer URL", ComponentLink1URL=http://www.panasonic.com/, ComponentLink2Description=Datasheet, ComponentLink2URL=http://industrial.panasonic.com/cdbs/www-data/pdf/RDA0000/AOA0000C86.pdf, DatasheetVersion=Apr-15, Mount="Surface Mount", Outputs=1, PackageDescription="2-Pin Surface Mount Device, Body 1.6 x 0.85 mm", PackageReference=0603, Packaging="Tape and Reel", Pins=28, Radiation Hardening=No, REACH SVHC="No SVHC", RoHSCompliant=true
R2 R3: library part CMP-2000-00608-1, "ERJ-3EKF6650V", Manufacturer=Panasonic, Part Number=ERJ-3EKF6650V
R4 R7: library part CMP-02407-000418-1, "RES SMD 100 OHM 1% 1/8W 0603 / MCT06030C1002FP500", Case Code (Imperial)=0603, Case Code (Metric)=1608, Max Operating Temperature=125°C, Max Power Dissipation=125mW, Min Operating Temperature=-55°C, Package Quantity=1, Power Rating=100mW, Resistance=10kR, Temperature Coefficient=50ppm/°C, Tolerance=1%, Voltage Rating=75V, Case/Package=0603, Composition="Thin Film", Contact Plating=Tin, Depth=0.85mm, Height=0.022inch, Lead Free="Lead Free", Length=1.55mm, Military Standard=Not, Mount="Surface Mount", Number of Terminations=2, Packaging="Tape and Reel", Radiation Hardening=No, Voltage Rating (DC)=75V, Width=0.8mm
R5 R6: library part CMP-2100-03662-2, "RES SMD 100K OHM 1% 1/10W 0603 / RC0603FR-07100KL", Case Code (Imperial)=0603, Case Code (Metric)=1608, Max Operating Temperature=155°C, Max Power Dissipation=100mW, Min Operating Temperature=-55°C, Resistance=100kR, Resistance Tolerance=1%, Resistor Type="Thick Film", Temperature Coefficient=100ppm/°C, Voltage Rating=50V, Working Voltage=75V, Case/Package=0603, Construction=Rectangular, Depth=0.8mm, Features="Moisture Resistant", Height=0.45mm, Lead Free="Lead Free", Length=1.6mm, Military Standard=Not, Number of Pins=2, Number of Terminations=2, Packaging="Tape and Reel", Power Rating=100mW, REACH SVHC="No SVHC", RoHS Compliant=Yes, Series=RC, Technology="THICK FILM", Termination=SMD/SMT, Tolerance=1%, Voltage Rating (DC)=50V, Width=0.8mm
R10: library part CMP-26527-000122-1, "RES 0 OHM JUMPER 1/4W 0603", Case Code (Imperial)=0603, Case Code (Metric)=1608, Max Operating Temperature=155°C, Min Operating Temperature=-55°C, Package Quantity=5000, Resistance=0mR, Case/Package=0603, Height=0.021inch, Length=0.061inch, Mount="Surface Mount", Number of Terminations=2, Packaging="Tape and Reel", Radiation Hardening=No, RoHS Compliant=Yes, Termination=Wraparound, Width=0.031inch
SW1: library part CMP-2000-05160-2, "SWITCH TACTILE SPST-NO 0.05A 12V", Case/Package=SMD/SMT, Color=Black, Contact Resistance=100mR, Current Rating=50mA, Max Operating Temperature=60°C, Max Voltage Rating (DC)=12V, Min Operating Temperature=-20°C, Operating Force=160gf, Package Quantity=1, Actuator Length=0.85mm, Actuator Material=Nylon, Actuator Type=Standard, ComponentLink1Description=Digikey, ComponentLink1URL=https://www.digikey.com/en/products/detail/PTS645SM43SMTR92%2520LFS/CKN9112TR-ND/1146840?utm_campaign=buynow&utm_medium=aggregator&curr=usd&utm_source=octopart, Contact Material=Silver, Contact Plating=Silver, Depth=9mm, Illumination Type=Non-Illuminated, Lead Free="Lead Free", Length=6mm, Max Current Rating=50mA, Mechanical Life=100000Cycles, Mount="Surface Mount", Orientation=Straight, Packaging="Tape and Reel", REACH SVHC="No SVHC", Switch Function=Off-Mom, Termination="Gull Wing", Throw Configuration=SPST, Voltage Rating (DC)=12V
U1: library part CMP-0243-00227-1, "ARM Cortex-M4 32-bit MCU+FPU, 512 KB Flash, 128 KB Internal RAM, 114 I/Os, 144-Pin LQFP, -40 to 105 degC, Tray", I/Os (High Current)=114, Operating Frequency(F) (Processor speed) (MHz)=180, Package Description=LQFP144, Package Reference="144-Pin Low Profile Quad Flat Package, Body 20 x 20 mm, Pitch 0.5 mm", Supply Voltage(Vcc) min (V)=1.7, ComponentLink1Description="Manufacturer URL", ComponentLink1URL=http://www.st.com/, ComponentLink2Description=Datasheet, ComponentLink2URL=http://www.st.com/st-web-ui/static/active/en/resource/technical/document/datasheet/DM00141306.pdf, Core="ARM Cortex-M4", D/A Converter=2, DatasheetVersion="Rev. 6", FLASH Size (Prog) (kB)=512, Internal RAM Size (kB)=128, Mounting Technology="Surface Mount", Packing=Tray
U2: library part CMP-0136-00450-1, "300mA CMOS LDO, 3-Pin SOT-223, Extended Temperature, Tape and Reel", DatasheetVersion="revB, 2002", PackageDescription="3-Lead Plastic Small Outline Transistor (DB) [SOT-223]", PackageReference=SOT-223-DB3, PackageVersion="revBB, Aug-2009"
Y1: library part CMP-1688-00002-2, "Crystal 8MHz ±20ppm 18pF SMD-4 5mm x 3.2mm / ABM3B-8.000MHZ-B2-T", Case/Package=CSMD, ESR (Equivalent Series Resistance)=200R, Frequency=8MHz, Frequency Stability=50ppm, Frequency Tolerance=20ppm, Load Capacitance=18pF, Max Operating Temperature=70°C, Min Operating Temperature=-20°C, Operating Frequency="8 MHz", Package Quantity=1000, Resistor Type=Ceramic, ComponentLink1Description=Digikey, ComponentLink1URL=https://www.digikey.com/en/products/detail/ABM3B-8.000MHZ-B2-T/535-9720-2-ND/1873166?utm_campaign=buynow&utm_medium=aggregator&curr=usd&utm_source=octopart, Depth=3.2mm, Height=0.043inch, Lead Free="Lead Free", Length=5mm, Mount="Surface Mount", Number of Pins=4, Packaging="Tape and Reel", Series=ABM3B, Series Resistance=200R, Termination=SMD/SMT, Tolerance=20ppm, Width=0.126inch
Y2: library part CMP-27762-010926-1, "XTAL Oscillator 12.288MHz ±50ppm HCMOS, TTL 3.3V 4-SMD 5mm x 3.2mm / ASFL1-12.288MHZ-EC-T", Case/Package=SMD/SMT, Frequency=12.288MHz, Frequency Stability=50ppm, Load Capacitance=15pF, Max Operating Temperature=70°C, Max Supply Current=15mA, Max Supply Voltage=3.63V, Min Operating Temperature=-20°C, Min Supply Voltage=2.97V, Operating Frequency="12.288 MHz", Operating Supply Voltage=3.3V, Depth=3.2mm, Height=0.051inch, Lead Free="Lead Free", Length=5mm, Mount="Surface Mount", Number of Pins=4, Packaging="Tape and Reel", Radiation Hardening=No, Series=ASFL1, Termination=SMD/SMT, Width=0.126inch

## Via types
v1: diameter 50, hole 28, Top Layer to Bottom Layer, 4 vias

## Nets (pads, with @x,y where several pads share a name; then routed paths per layer and width w, separated by ;. In a path a pad name is that pad's centre, name@x,y a point inside that pad or via, vN(x,y) a via of type N, cw(c..) or ccw(c..) an arc to the next point about the centre after c; other vN are vias at no path point)
5V: C21.1 C22.2 C24.2 C31.2 D1.5 FB1.2 J3.2 J6.7 J6.8 J6.9 U2.1
D_N: D1.6 J1.2 U1.103
D_P: D1.1 J1.3 U1.104
GND: C1.1 C2.1 C3.1 C4.1 C5.1 C6.1 C7.1 C8.1 C9.1 C10.1 C11.1 C12.1 C13.1 C15.2 C18.2 C19.2 C20.1 C21.2 C22.1 C23.2 C24.1 C25.1 C26.2 C27.1 C28.2 C29.2 C30.2 C31.1 D1.2 J1.5 J1.6 J1.7 J1.8 J1.9 J1.10 J1.11 J2.6 J3.6 J4.6 J5.5 J6.14 J6.15 J6.16 J6.17 J6.18 J6.19 J10.4 J10.6 J10.8 J10.10 J10.12 J10.14 J10.16 J10.18 J10.20 R3.2 R4.1 R5.2 R6.2 R10.2 SW1.4 U1.16 U1.31 U1.38 U1.51 U1.61 U1.83 U1.94 U1.107 U1.120 U1.130 U1.143 U2.2 U2.4 Y1.2 Y1.4 Y2.2 | length 714.7
  Top Layer w10: C19.2 2762.95,3263.62 2807.95,3308.62 2842.64,3308.62 Y1.2 ; U1.16 2889.21,3038.39 2900,3049.18 v1(2900,3060) 3018.74,3178.74 Y1.4 3037.36,3251.38 3075.73,3251.38 3080.73,3256.38 C18.2 ; U1.143 3325.43,2844.8 3335.85,2855.22 R4.1
I2S2_CK: J4.3 U1.74
I2S2_SD: J4.1 U1.27
I2S2_WS: J4.5 U1.73
I2S3_CK: J2.3 U1.111
I2S3_SD: J2.1 U1.46
I2S3_WS: J2.5 U1.40
I2S_CK: U1.99 Y2.3
L/R_1: J2.4 R5.1 U1.15
L/R_2: J4.4 R6.1 U1.90
LED_R: R2.2 U1.14 | length 613.5
  Top Layer w10: U1.14 2928.93,2937.67 2928.93,2980.27 3314.29,3365.63 3318.74,3365.63 3331.46,3378.35 R2.2
LED_Y: R1.2 U1.13 | length 510.3
  Top Layer w10: U1.13 2948.61,2937.67 2948.61,2977.33 3031.29,3060 3080,3060 3220,3200 R1.2
NetC1_2: C1.2 U1.106
NetC2_2: C2.2 U1.71
NetC17_1: C17.1 SW1.3
NetC17_2: C17.2 R7.1 SW1.1 U1.25
NetC18_1: C18.1 U1.23 Y1.1 | length 618.6
  Top Layer w10: U1.23 2751.42,3040.04 2988.31,3276.93 2988.31,3308.62 3006.93,3327.24 Y1.1 3071.3,3327.24 3087.28,3311.26 3112.36,3311.26 C18.1
NetC19_1: C19.1 U1.24 Y1.3 | length 457.1
  Top Layer w10: U1.24 2731.73,3056.77 2861.26,3186.29 Y1.3 2844.88,3216.38 C19.1
NetC23_1: C23.1 FB1.1 J1.1
NetDS1_2: DS1.2 R1.1 | length 98
  Top Layer w10: R1.1 DS1.2
NetDS2_2: DS2.2 R2.1 | length 121.9
  Top Layer w10: R2.1 DS2.2
NetDS3_2: DS3.2 R3.1
NetR10_1: R10.1 U1.138
RESET: J5.1 J10.15 SW1.2
SPI1_MISO: J3.3 U1.42
SPI1_MOSI: J3.5 U1.43
SPI1_SCK: J3.1 U1.41
SWCLK: J5.4 J10.9 U1.109
SWDIO: J5.2 J10.7 U1.105
SWO: J5.6 J10.13 U1.133
TIM1_CH1: J6.20 U1.60
TIM2_CH3: J6.10 U1.36
USART1_RX: J6.1 U1.102
USART1_TX: J6.11 U1.101
USART2_RX: J6.2 U1.37
USART2_TX: J6.12 U1.119
USART3_RX: J6.3 U1.45
USART3_TX: J6.13 U1.69
VDD: C3.2 C4.2 C5.2 C6.2 C7.2 C8.2 C9.2 C10.2 C11.2 C12.2 C13.2 C15.1 C20.2 C25.2 C26.1 C27.2 C28.1 C29.1 C30.1 DS1.1 DS2.1 DS3.1 J2.2 J3.4 J4.2 J5.3 J6.4 J6.5 J6.6 J10.1 J10.2 J10.19 R4.2 R7.2 U1.6 U1.17 U1.30 U1.32 U1.33 U1.39 U1.52 U1.62 U1.72 U1.84 U1.95 U1.108 U1.121 U1.131 U1.144 U2.3 Y2.1 Y2.4 | length 716.5
  Top Layer w10: U1.6 3086.41,2937.67 3086.41,2977.33 3153.41,3044.33 3177.76,3044.33 3191.46,3058.03 C11.2 ; v1(3360,3020) 3257.32,2917.32 U1.144 3292.76,2864.49 3333.05,2904.78 R4.2 ; DS1.1 v1(3640,3200) ; DS2.1 3620,3381.3 v1(3660,3421.3)
pads on no net: D1.3 D1.4 J1.4 J10.3 J10.5 J10.11 J10.17 U1.1 U1.2 U1.3 U1.4 U1.5 U1.7 U1.8 U1.9 U1.10 U1.11 U1.12 U1.18 U1.19 U1.20 U1.21 U1.22 U1.26 U1.28 U1.29 U1.34 U1.35 U1.44 U1.47 U1.48 U1.49 U1.50 U1.53 U1.54 U1.55 U1.56 U1.57 U1.58 U1.59 U1.63 U1.64 U1.65 U1.66 U1.67 U1.68 U1.70 U1.75 U1.76 U1.77 U1.78 U1.79 U1.80 U1.81 U1.82 U1.85 U1.86 U1.87 U1.88 U1.89 U1.91 U1.92 U1.93 U1.96 U1.97 U1.98 U1.100 U1.110 U1.112 U1.113 U1.114 U1.115 U1.116 U1.117 U1.118 U1.122 U1.123 U1.124 U1.125 U1.126 U1.127 U1.128 U1.129 U1.132 U1.134 U1.135 U1.136 U1.137 U1.139 U1.140 U1.141 U1.142

## Polygon pours and split planes (outlines as drawn)
VDD on Layer 2 (PWR) "NONET_L03_P002" (solid, shelved, pour order 2): 1020,1020 1020,3600 4760,3600 4760,1020
GND on Layer 1 (GND) "GND_L02_P004" (solid, pour order 4): 1020,860 1020,3880 4760,3880 4760,860
GND on Layer 1 (GND) "NONET_L02_P001" (solid, shelved, pour order 1): 1020,1020 1020,3600 4760,3600 4760,1020

## Silkscreen, mask and mechanical layers (free items; w line width, h text height)
Mechanical 1:
  the board outline again, w10

## Text inside footprints (layer, text, board x,y; h text height)
J10: Top Overlay "19" at 4138.5,2889.61 h40 r90; Top Overlay "20" at 4038.5,2889.61 h40 r90; Top Overlay "1" at 4140.87,1878.58 h40 r90; Top Overlay "2" at 4040.87,1866.77 h40 r90